# Altium PCB AEON.Feeder.BeamBreak.PcbDoc
Units mm, origin at the board's own origin, x right, y up, seen from the top; angles counter-clockwise.
Board outline 6.5 x 23 mm, 2 copper layers (Top Layer, Bottom Layer), stack 0.747 mm thick; 6 components, 5 nets, 18 pads, 0 vias.
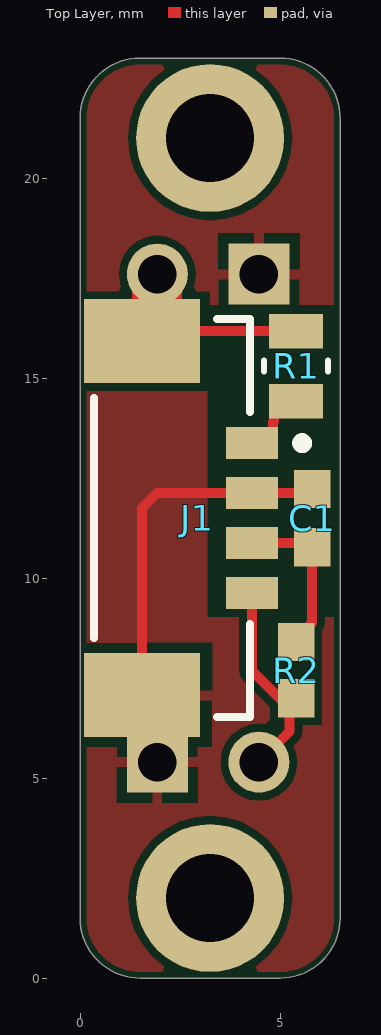
[diagram p0: Top Layer view]
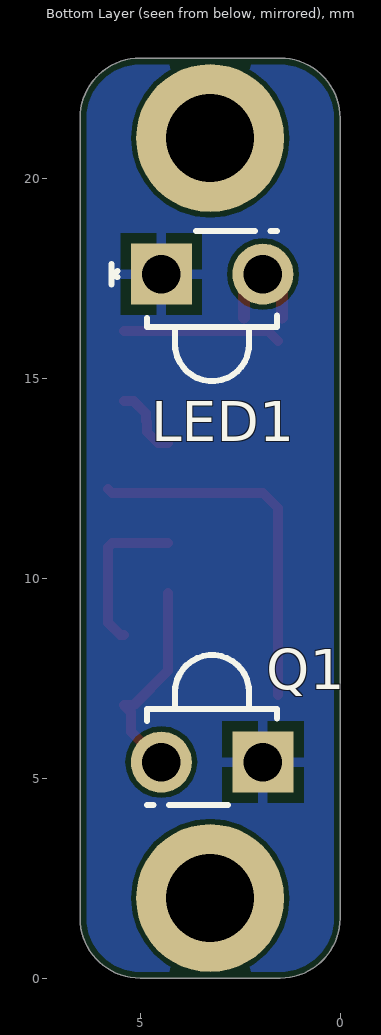
[diagram p1: Bottom Layer view, seen from below]
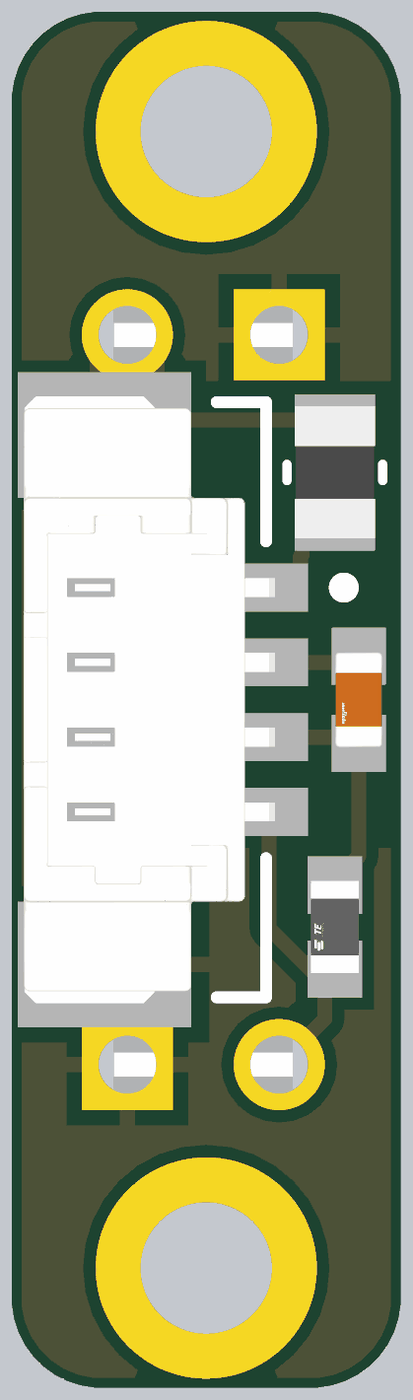
[diagram p2: 3D render of the assembled board from above, using the file's embedded part models]

## Layer stack, top to bottom
Top Solder: solder mask 0.0254, SM-001, Dk 4
Top Layer: signal copper 0.018
Dielectric 1: core 0.7112, Core-039, Dk 4.8
Bottom Layer: signal copper 0.018
Bottom Solder: solder mask 0.0254, SM-001, Dk 4

## Board outline
0,1.5 0,21.5 cw(c1.5,21.5) 1.5,23 5,23 cw(c5,21.5) 6.5,21.5 6.5,1.5 cw(c5,1.5) 5,0 1.5,0 cw(c1.5,1.5)

## Design rules (kind name [scope] priority, off if disabled: settings)
BoardOutlineClearance [All] p1: gap=0.15 ignorepadtopadclearanceinfootprint=FALSE
Clearance "Clearance - Top" [OnLayer('Top Layer')] p1: gap=0.2 ignorepadtopadclearanceinfootprint=TRUE except(0.3: Arc-Hole Track-Hole SMDPad-Hole THPad-Hole Via-Hole Fill-Hole Poly-Hole Region-Hole Text-Hole)
Clearance "Clearance - Bottom" [OnLayer('Bottom Layer')] p2: gap=0.127 ignorepadtopadclearanceinfootprint=TRUE except(0.229: Arc-Hole Track-Hole SMDPad-Hole THPad-Hole Via-Hole Fill-Hole Poly-Hole Region-Hole Text-Hole)
Clearance "Clearance - Int1" [OnLayer('Int1')] p3: gap=0.152 ignorepadtopadclearanceinfootprint=TRUE except(0.229: Arc-Hole Track-Hole SMDPad-Hole THPad-Hole Via-Hole Fill-Hole Poly-Hole Region-Hole)
Clearance "Clearance - Int2" [OnLayer('Int2')] p4: gap=0.152 ignorepadtopadclearanceinfootprint=TRUE except(0.229: Arc-Hole Track-Hole SMDPad-Hole THPad-Hole Via-Hole Fill-Hole Poly-Hole Region-Hole)
ComponentClearance ComponentClearance_J1J4 [InComponent('J1') vs InComponent('J4')] p1: gap=0.001 collisioncheckmode=3 verticalgap=0.254 showdistances=FALSE
ComponentClearance ComponentClearance_J2J4 [InComponent('J2') vs InComponent('J4')] p2: gap=0.001 collisioncheckmode=3 verticalgap=0.254 showdistances=FALSE
ComponentClearance [All] p3: gap=0.254 collisioncheckmode=3 verticalgap=0.254 showdistances=FALSE donotcheckwithout3dbody=TRUE
Height [All] p1: minheight=0 maxheight=40 prefheight=12.7
HoleSize "HoleSize Via - Top-Int1" [InDrillLayerPair('[UVIA] Top Layer - Int1')] p1: absolutevalues=TRUE maxlimit=0.2 minlimit=0.15 maxpercent=80.000 minpercent=20.000
HoleSize "HoleSize Via - Bot-Int2" [InDrillLayerPair('[UVIA] Int2 - Bottom Layer')] p2: absolutevalues=TRUE maxlimit=0.2 minlimit=0.15 maxpercent=80.000 minpercent=20.000
HoleSize [All] p3: absolutevalues=TRUE maxlimit=4 minlimit=0.25 maxpercent=80.000 minpercent=20.000
HoleToHoleClearance [All] p1: gap=0.1 allowstackedmicrovias=TRUE
MinimumAnnularRing MinimumAnnularRing_VIA [IsVia] p1: minimumring=0.075
MinimumAnnularRing [All] p2: minimumring=0.1
MinimumSolderMaskSliver [All] p1: minsoldermaskwidth=0.076
PasteMaskExpansion PasteMaskExpansion_FDMC8030 [HasFootprint('TRANS_FDMC8030')] p1: expansion=0 percent=-20.000000
PasteMaskExpansion PasteMaskExpansion_IC_TPSM5601RSHRDAR [HasFootprint('IC_TPSM5601R5HRDAR')] p2: expansion=0 percent=-20.000000
PasteMaskExpansion PasteMaskExpansion_SOP65P490X110-8N [HasFootprint('SOP65P490X110-8N')] p3: expansion=0 percent=-20.000000
PasteMaskExpansion [All] p4: expansion=0
PolygonConnect PolygonConnect_SOLID [InNetClass('Power Nets')] p1: connectstyle=Direct reliefconductorwidth=0.254 reliefentries=4 polygonreliefangle="90 Angle" airgapwidth=0.254
PolygonConnect PolygonConnect_SOLID_GND [InComponentClass('SolidGND')] p2: connectstyle=Direct reliefconductorwidth=0.254 reliefentries=4 polygonreliefangle="90 Angle" airgapwidth=0.254
PolygonConnect [All] p3: connectstyle=Relief reliefconductorwidth=0.254 reliefentries=4 polygonreliefangle="90 Angle" airgapwidth=0.254
RoutingVias Vias_Top-Bottom [InDrillLayerPair('Top Layer - Bottom Layer')] p1: holewidth=0.25 width=0.55 viastyle="Through Hole" minholewidth=0.25 minwidth=0.5 maxholewidth=0.35 maxwidth=0.65
RoutingVias Vias_Blind_Top-Int1 [InDrillLayerPair('[UVIA] Top Layer - Int1')] p2: holewidth=0.15 width=0.3 viastyle="Through Hole" minholewidth=0.15 minwidth=0.3 maxholewidth=0.25 maxwidth=0.474
RoutingVias Vias_Blind_Bot-Int2 [InDrillLayerPair('[UVIA] Int2 - Bottom Layer')] p3: holewidth=0.15 width=0.3 viastyle="Through Hole" minholewidth=0.15 minwidth=0.3 maxholewidth=0.25 maxwidth=0.474
RoutingVias Vias_Burried [InDrillLayerPair('Int1 - Int2')] p4: holewidth=0.25 width=0.504 viastyle="Through Hole" minholewidth=0.25 minwidth=0.504 maxholewidth=0.35 maxwidth=0.604
SilkToSilkClearance [All] p1: silktosilkclearance=0.1
SilkToSolderMaskClearance [IsPad] p1: minsilkscreentomaskgap=0.15 clearancetoexposedcopper=TRUE
SolderMaskExpansion SolderMaskExpansion_Vias [IsVia] p1: expansion=0 istentingtop=TRUE
SolderMaskExpansion [All] p2: expansion=0 istentingtop=FALSE
UnRoutedNet [All] p1: checkbadconnections=TRUE
ViasUnderSMD [All] p1: allowed=TRUE
Width Width_PowerNets [InNetClass('Power Nets')] p1: maxlimit=1 minlimit=0.203 preferedwidth=0.4
Width [All] p2: maxlimit=0.305 minlimit=0.127 preferedwidth=0.203
21 further rules are at their usual default settings.

## Components (designator, comment, footprint, x,y, rotation, side; value= is the part's Value field where it differs from the comment)
C1 "C0603-100nF-100V-10%-X7R" FP-GRM188-0_1-e0_2_0_5-IPC_B 5.8,11.5 r270 top value=100nF
J1 "53398-0471" FP-533980471-MFG 2.3,11.5 r90 top
LED1 "GL480E00000F" GL480_5.8mm 1.93,17.6 r0 bottom
Q1 "PT480FE0000F" PT480_5.8 4.47,5.4 r180 bottom
R1 "RES 0805 200R 0.1% 125mW" RES_ERA6A_0805_PAN 5.4,15.3 r270 top value=200
R2 "R0603-6k8-1/16W-0.1%" FP-CPF0603-IPC_B 5.4,7.7 r90 top value=6.8k

## Footprints (in the part's own frame and the unit in brackets; to place one, negate y for a bottom-side part, rotate by r counter-clockwise, add the part's x,y. Pads: shape width x height; smd on the part's side, far side on the other; paste and mask are expansions set on the pad)
FP-533980471-MFG [mm]
  rect 0.8x1.3 smd paste+0 mask+0: 1(1.875,-2) 2(0.625,-2) 3(-0.625,-2) 4(-1.875,-2)
  rect 2.1x2.9 smd paste+0 mask+0: 5(-4.425,0.75) 6(4.425,0.75)
  silkscreen extent -4.97,-3.38 4.97,1.95, body extent -5.58,-2.75 5.58,2.35, height 0.25
FP-CPF0603-IPC_B [mm]
  rect 0.958x0.912 smd paste+0 mask+0: 1(-0.702,0) 2(0.702,0)
  body extent -1.43,-0.71 1.43,0.71, height 0.25
FP-GRM188-0_1-e0_2_0_5-IPC_B [mm]
  rect 0.959x0.912 smd paste+0 mask+0: 1(-0.727,0) 2(0.727,0)
  body extent -1.46,-0.71 1.46,0.71, height 0.25
GL480_5.8mm [mil] "5.8mm standoff from PCB surface to centre of LED Lens"
  rect 60x60 hole 38 mask+0: 1(100,0)
  round 60 hole 38 mask+0: 2(0,0)
  silkscreen extent -14,-42 149,105, body extent -9,-37 109,79, height 304
PT480_5.8 [mil] "5.8mm standoff from PCB to LED Lens"
  rect 60x60 hole 38 mask+0: 1(100,0)
  round 60 hole 38 mask+0: 2(0,0)
  silkscreen extent -14,-42 114,105, body extent -9,-37 109,79, height 304
RES_ERA6A_0805_PAN [mil] "IPC RES 0805 N"
  rect 34x53 smd paste+0 mask+0: 1(-34.5,0) 2(34.5,0)
  silkscreen extent -5,-32 5,32, body extent -44,-26 44,26, height 24

## Part data
C1: library part CMP-611-0027-19, "0.1µF ±10% 100V Ceramic Capacitor X7R 0603 (1608 Metric)", Capacitance=100nF, Capacitor Type=Ceramic, Case Code (Imperial)=0603, Case Code (Metric)=1608, Dielectric=X7R, Max Operating Temperature=125°C, Min Operating Temperature=-55°C, Package Quantity=1, Tolerance=10%, Voltage=100V, Case/Package=0603, Construction=Flat, Depth=0.8mm, Height=0.8mm, Lead Free="Lead Free", Length=1.6mm, Material=Ceramic, Mount="Surface Mount", Packaging="Tape and Reel", Pick&PlaceFootprint=0603_CAP, Radiation Hardening=No, REACH SVHC="No SVHC", RoHS=Yes, RoHS Compliant=Yes, Series=GRM, Size=0.8mm, Termination=SMD/SMT, Thickness=0.035inch, Voltage rating=100V, Voltage Rating (DC)=100V, Weight=0.000222oz, Width=0.8mm
J1: library part CMP-370-0030-2, "Board Connector, 4 Contact(s), 1 Row(s), Male, Straight, 0.049 inch Pitch, Surface Mount Terminal, Locking, Natural Insulator, Receptacle", Contact Resistance=20mR, Dielectric Withstanding Voltage (AC)=250V, Flammability Rating="UL94 V-0", Insulation Color=Natural, Insulation Resistance=100MR, Max Operating Temperature=85°C, Min Operating Temperature=-40°C, Rated Current (Signal)=1A, Board Mounting Option="FITTING NAIL", Body Breadth=0.146inch, Body Depth=0.185inch, Body Length=0.383inch, Body/Shell Style=RECEPTACLE, Connector Type="BOARD CONNECTOR", Contact Finish - Mating="MATTE TIN (39) OVER NICKEL", Contact Finish - Termination="Matte Tin (Sn) - with Nickel (Ni) barrier", Contact Gender=Male, Contact Material=Bronze, Contact Pattern=RECTANGULAR, Contact Style="Blade Pin", DIN Conformance=No, Durability=30Cycles, Filter Feature=No, IEC Conformance=No, Insulation Material=Polyamide, JESD-609 Code=e3, Mating Contact Pitch=0.049inch, Mating Information="MULTIPLE MATING PARTS AVAILABLE", MIL Conformance=No, Mixed Contacts=No, Mount=Board, Mounting Option 1=LOCKING, Mounting Style=STRAIGHT, Number Of Connectors=1, Number of Contacts=4, Number Of PCB Rows=1, Number of Rows Loaded=1, Option="General Purpose", PartNumber=53398-0471, PCB Contact Pattern=RECTANGULAR, Plating Thickness=39uin, Polarization Key="POLARIZED HOUSING", REACH SVHC=Yes, Reference Standard=UL, Reliability=COMMERCIAL, RoHS Compliant=Yes, Terminal Pitch=1.25mm, Termination=SMD/SMT
LED1: library part CMP-520-0009-6, "EMITTER IR 950NM 50MA RADIAL", Mount="Through Hole", PartNumber=GL480E00000F
Q1: library part CMP-500-0000-5, "SHARP PT480FE0000F PHOTOTRANSISTOR", Mount="Through Hole", PartNumber=PT480FE0000F
R1: library part CMP-633-0043-2, "RES 0805 200 Ohm 0.1% 1/8W ±10ppm/°C Thin Film", Case/Package=R0805, Power rating=125mW, Resistance=200, Tolerance=0.1%, Voltage rating=100V, Mount="Surface Mount", PartNumber="RES 0805 200R 0.1% 125mW", Pick&PlaceFootprint=R0805, RoHS=Yes
R2: library part CMP-633-0025-15, "Surface Mount Resistor 6.8k Ohm 1/16 W 0.1% 0603 (1608 Metric)", Case Code (Imperial)=0603, Case Code (Metric)=1608, Max Operating Temperature=155°C, Max Power Dissipation="62.5 mW", Min Operating Temperature=-55°C, Number of Resistors=1, Power rating=62.5mW, Resistance=6.8k, Resistance Tolerance=0.1%, Resistor Type="Thin Film", Temperature Coefficient=25ppm/°C, Voltage rating=50V, Case/Package=0603, Composition="Thin Film", ELV=Compliant, Height=0.45mm, Length=1.6mm, Mount="Surface Mount", Number of Pins=2, Number of Terminations=2, Packaging="Tape and Reel", Pick&PlaceFootprint=R0603, REACH SVHC="No SVHC", RoHS=Yes, RoHS Compliant=Yes, Series=CPF, Size Code=0603, Technology="Thin Film", Termination=Solder, Tolerance=0.1%, Voltage Rating (DC)=50V, Weight=7.1E-05oz, Width=0.8mm

## Free pads (board coordinates)
  round 3.7 hole 2.2: MP1(3.25,2) MP2(3.25,21)

## Nets (pads, with @x,y where several pads share a name; then routed paths per layer and width w, separated by ;. In a path a pad name is that pad's centre, name@x,y a point inside that pad or via, vN(x,y) a via of type N, cw(c..) or ccw(c..) an arc to the next point about the centre after c; other vN are vias at no path point)
3V3: C1.2 J1.3 R2.2 | length 4
  Top Layer w0.25: J1.3 5.698,10.875 C1.2 5.8,8.883 5.493,8.576 R2.2@5.4,8.576
GND: C1.1 J1.2 J1.5 LED1.1 Q1.1 | length 9.1
  Top Layer w0.25: J1.5 1.55,11.75 1.925,12.125 J1.2 5.698,12.125 C1.1
IR_LED: J1.1 R1.2 | length 1.8
  Top Layer w0.25: J1.1 4.55,13.375 4.825,13.65 4.825,13.9 4.852,13.927 4.852,14.117 5.159,14.424 R1.2
IR_PT: J1.4 Q1.2 R2.1 | length 5.2
  Top Layer w0.25: J1.4 4.3,7.682 5.159,6.824 5.4,6.824 5.233,6.657 5.233,6.163 Q1.2
NetLED1_2: J1.6 LED1.2 R1.1 | length 5.9
  Top Layer w0.25: J1.6 1.801,16.176 R1.1
  Top Layer w0.3: J1.6@1.45,16.512 LED1.2@1.45,17.487 ; J1.6@2.4,16.512 LED1.2@2.4,17.487

## Polygon pours and split planes (outlines as drawn)
GND on Bottom Layer "Bottom Layer-GND" (solid, pour order 1): 0,1.5 0,21.5 cw(c1.5,21.5) 1.5,23 5,23 cw(c5,21.5) 6.5,21.5 6.5,1.5 cw(c5,1.5) 5,0 1.5,0 cw(c1.5,1.5)
GND on Top Layer "Top Layer-GND" (solid, pour order 0): 0,1.5 0,21.5 cw(c1.5,21.5) 1.5,23 5,23 cw(c5,21.5) 6.5,21.5 6.5,1.5 cw(c5,1.5) 5,0 1.5,0 cw(c1.5,1.5)

## Other copper
Top Layer:
  pour cut-out: 6.392,16.828 6.392,9.025 3.175,9.025 3.175,16.828

## Silkscreen, mask and mechanical layers (free items; w line width, h text height)
Mechanical 1:
  the board outline again, w0.2
Drill Drawing:
  circle w0.254: c12.556,9.8 r0.847
  lines w0.254: 11.709,5.143 13.403,5.143 13.403,6.837 11.709,6.837 11.709,5.143
  lines w0.381: 10.191,4 274.887,4 ; 10.191,11.62 274.887,11.62 ; 24.183,0.191 24.183,15.43 ; 36.372,0.191 36.372,15.43 ; 64.304,0.191 64.304,15.43 ; 77.153,0.191 77.153,15.43 ; 95.791,0.191 95.791,15.43 ; 133.88,0.191 133.88,15.43 ; 148.862,0.191 148.862,15.43 ; 167.805,0.191 167.805,15.43 ; 184.311,0.191 184.311,15.43 ; 205.997,0.191 205.997,15.43 ; 239.87,0.191 239.87,15.43 ; 10.191,0.191 274.887,0.191 274.887,15.43 10.191,15.43 10.191,0.191
  text "Symbol" at 12.477,12.763 h1.83
  text "Count" at 25.326,12.763 h1.83
  text "Hole Size" at 37.515,12.763 h1.83
  text "Plated" at 65.447,12.763 h1.83
  text "Hole Type" at 78.296,12.763 h1.83
  text "Drill Layer Pair" at 96.934,12.763 h1.83
  text "Via/Pad" at 135.023,12.763 h1.83
  text "Pad Shape" at 150.005,12.763 h1.83
  text "Template" at 168.948,12.763 h1.83
  text "Description" at 185.454,12.763 h1.83
  text "Hole Tolerance (+)" at 207.14,12.763 h1.83
  text "Hole Tolerance (-)" at 241.013,12.763 h1.83
  text "2" at 25.326,8.954 h1.52
  text "2.200mm (86.61mil)" at 37.515,8.954 h1.52
  text "PTH" at 65.447,8.954 h1.52
  text "Round" at 78.296,8.954 h1.52
  text "Top Layer - Bottom Layer" at 96.934,8.954 h1.52
  text "Pad" at 135.023,8.954 h1.52
  text "Rounded" at 150.005,8.954 h1.52
  text "c370h220" at 168.948,8.954 h1.52
  text "4" at 25.326,5.143 h1.52
  text "0.965mm (38.00mil)" at 37.515,5.143 h1.52
  text "PTH" at 65.447,5.143 h1.52
  text "Round" at 78.296,5.143 h1.52
  text "Top Layer - Bottom Layer" at 96.934,5.143 h1.52
  text "Pad" at 135.023,5.143 h1.52
  text "(Mixed)" at 150.005,5.143 h1.52
  text "(Mixed)" at 168.948,5.143 h1.52
  text "6 Total" at 25.326,1.333 h1.52